# Altium PCB tsc.1r.PcbDoc
Units mm, origin at the board's own origin, x right, y up, seen from the top; angles counter-clockwise.
Board outline 151 x 86.38 mm, 2 copper layers (Top Layer, Bottom Layer); 15 components, 20 nets, 51 pads, 0 vias.
Unrouted connection lines stored in the file: 1.
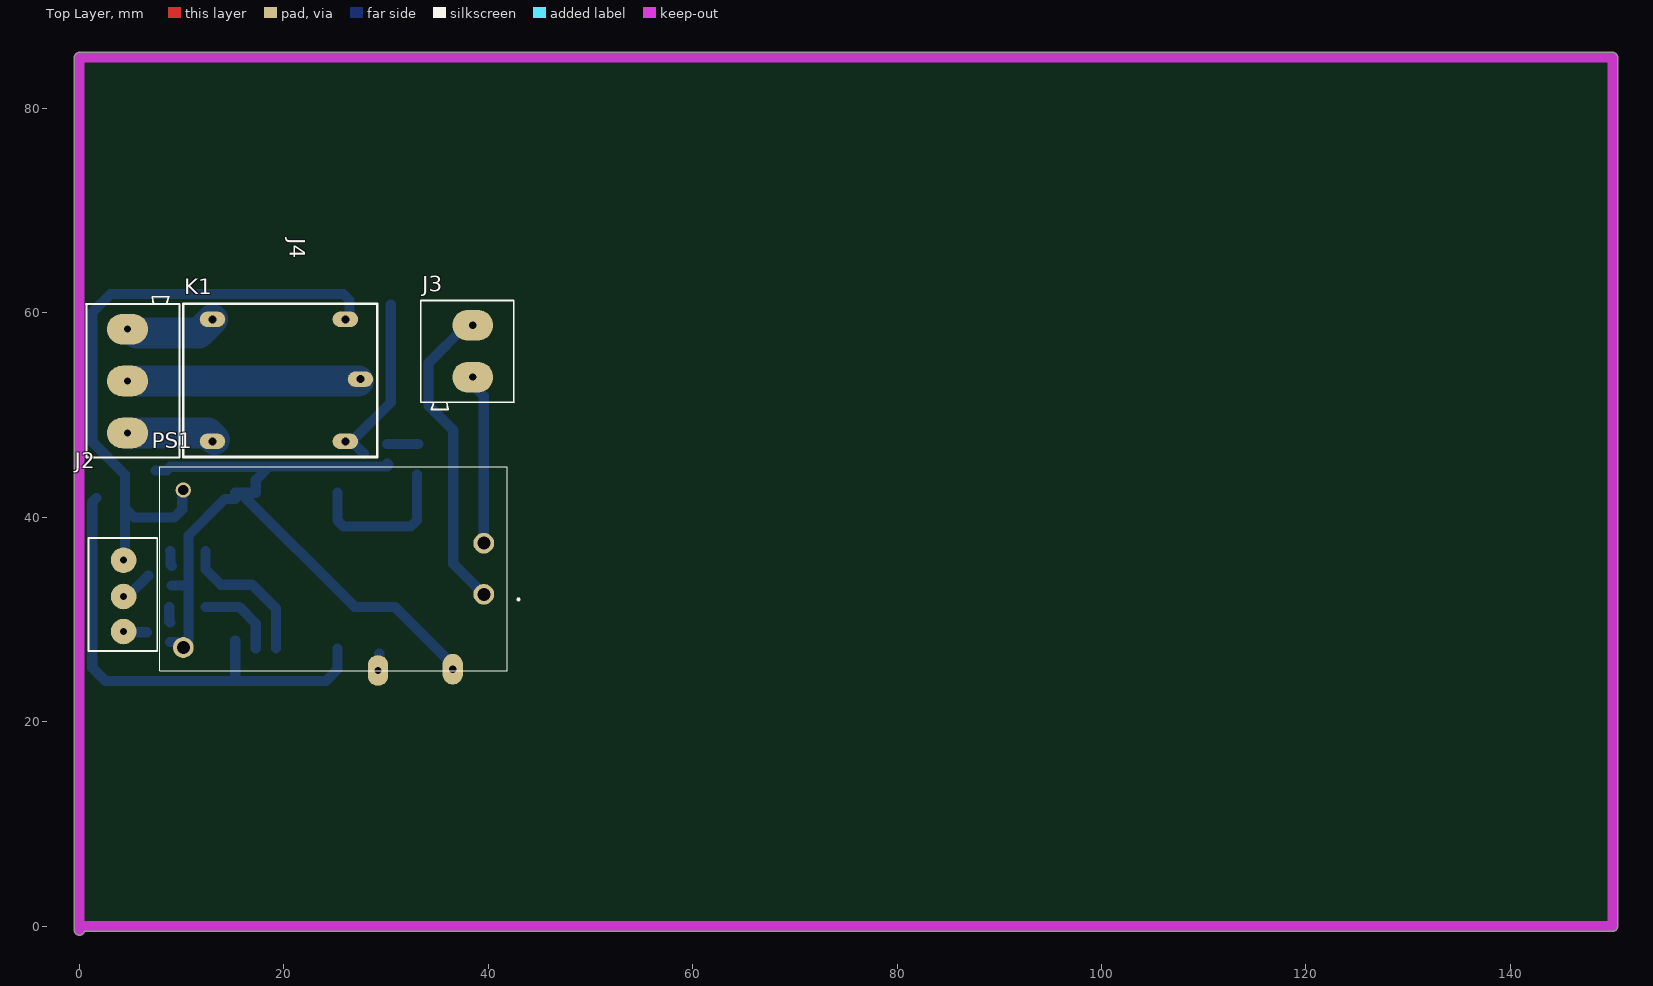
[diagram p0: Top Layer view]
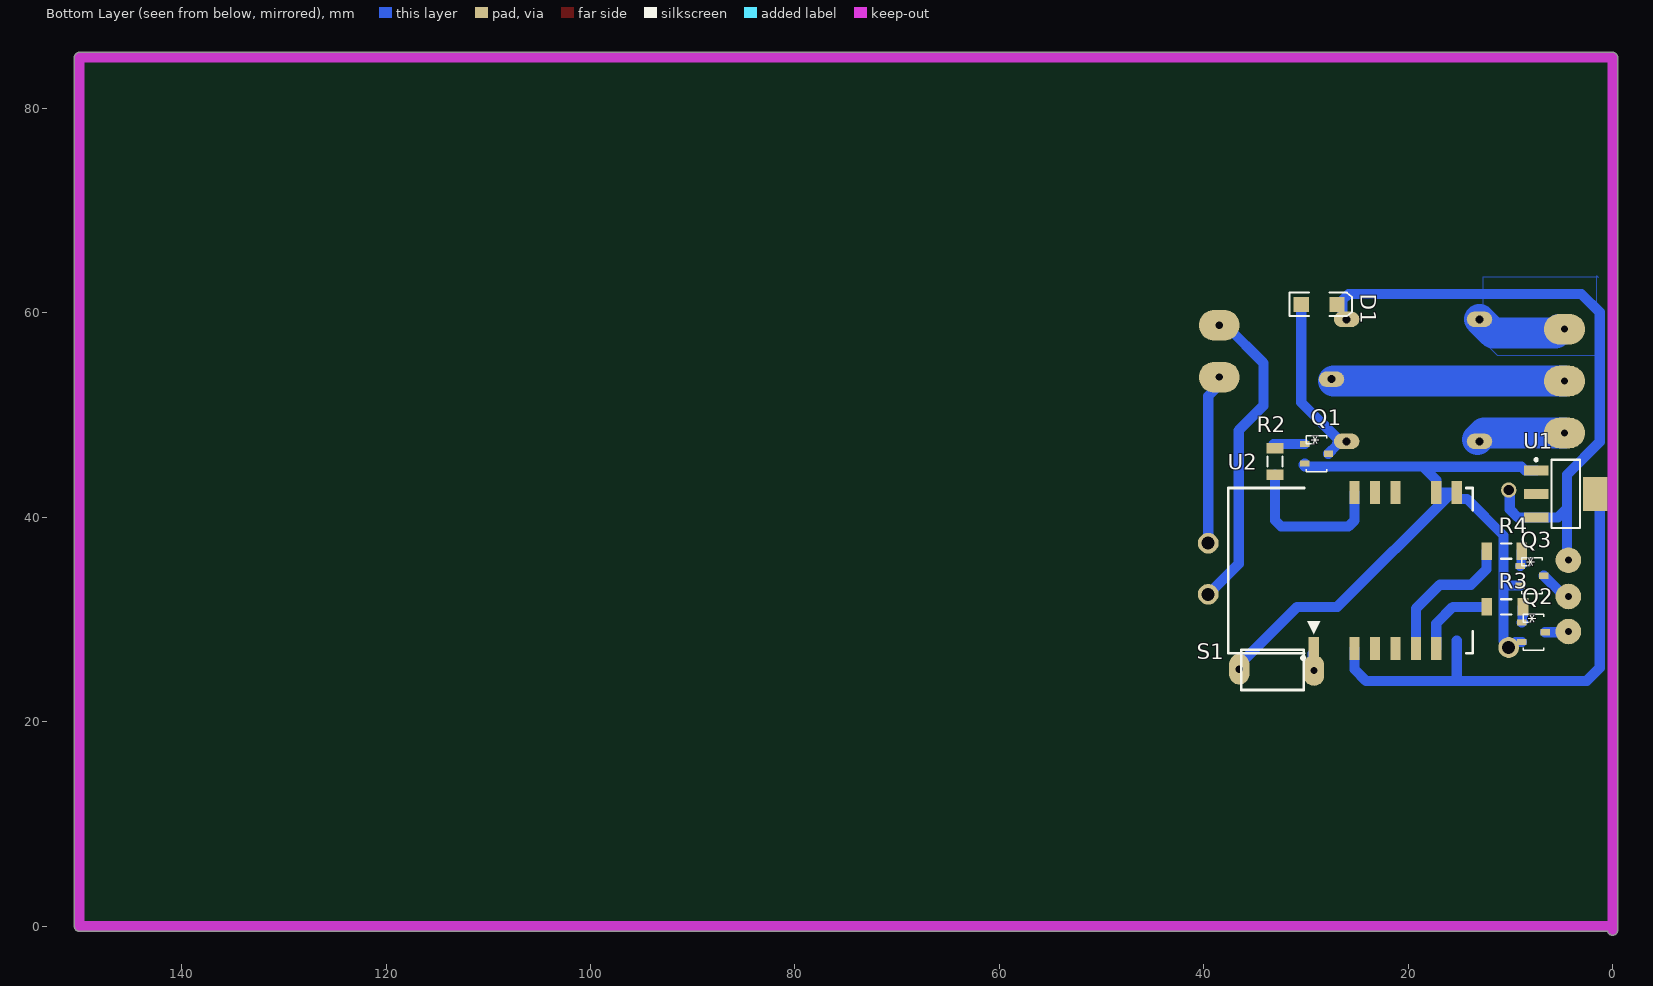
[diagram p1: Bottom Layer view, seen from below]
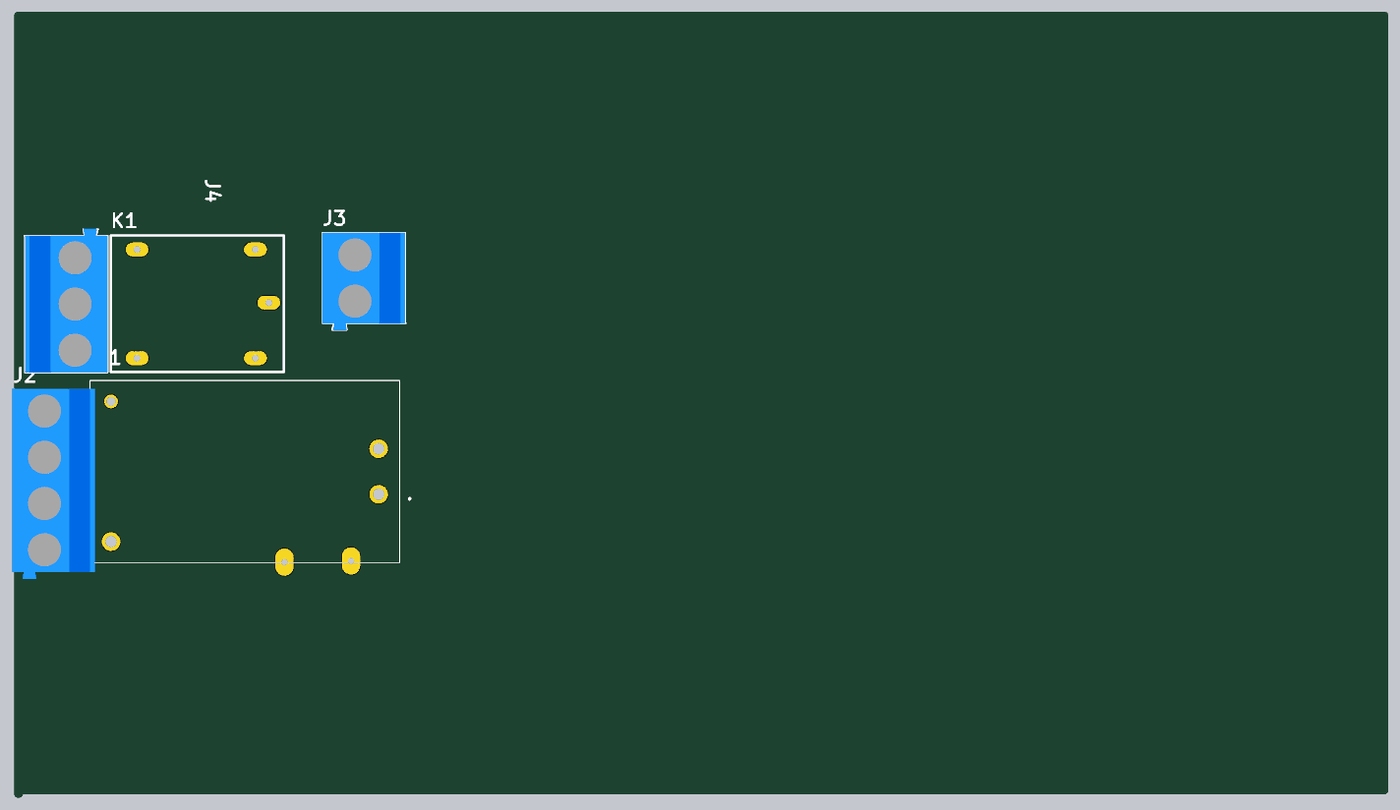
[diagram p2: 3D render of the assembled board from above, using the file's embedded part models]

## Layer stack, top to bottom
Top Solder: solder mask 0.0102, Solder Resist, Dk 3.5
Top Layer: signal copper 0.0356
Dielectric 1: dielectric 0.32, FR-4, Dk 4.8
Bottom Layer: signal copper 0.0356
Bottom Solder: solder mask 0.0102, Solder Resist, Dk 3.5

## Board outline
-0.5,-0.381 -0.5,85 cw(c0,85) 0,85.5 150,85.5 cw(c150,85) 150.5,85 150.5,0 cw(c150,0) 150,-0.5 0.486,-0.5 cw(c0,-0.381)

## Design rules (kind name [scope] priority, off if disabled: settings)
Clearance Clearance_1 [InPolygon] p1: gap=0.8 ignorepadtopadclearanceinfootprint=FALSE
Clearance [All] p2: gap=0.254 ignorepadtopadclearanceinfootprint=FALSE except(0: Arc-Hole Track-Hole SMDPad-Hole THPad-Hole Via-Hole Fill-Hole Poly-Hole Region-Hole Text-Hole)
PolygonConnect [All] p1: connectstyle=Relief reliefconductorwidth=0.254 reliefentries=4 polygonreliefangle="90 Angle" airgapwidth=0.254
RoomDefinition tsc.1r [InComponentClass('tsc.1r')] p1: confinementstyle=ConfineIn formatcopy=TRUE lockcomponents=FALSE outline 144.907,-4.953 247.904,-4.953 247.904,23.114 144.907,23.114
RoutingLayers [All] p1: top layer_v5=FALSE bottom layer_v5=TRUE
RoutingVias [All] p1: holewidth=0.711 width=2.5 viastyle="Through Hole" minholewidth=0.711 minwidth=1.27 maxholewidth=0.711 maxwidth=2
SolderMaskExpansion [All] p1: expansion=0.102 istentingtop=FALSE
Width [All] p1: maxlimit=3 minlimit=0.5 preferedwidth=1
29 further rules are at their usual default settings.

## Components (designator, comment, footprint, x,y, rotation, side; value= is the part's Value field where it differs from the comment)
D1 "D Tunnel1" 3.2X1.6X1.1 28.702,60.833 r180 bottom
J2 "TBlock-4" "KF300-4 PIN" 4.318,26.416 r180 top
J3 "TBlock-2" "KF300-2 PIN" 38.481,53.721 r180 top
J4 "TBlock-3" "KF300-3 PIN" 4.699,58.42 r0 top
K1 "Relay-12vDC" Relays 29.146,45.91 r90 top
PS1 "HLK-PM01" HLKPM01 39.56,32.472 r180 top
Q1 "MMBT3904-TP" SOT23-3 28.956,47.498 r270 bottom
Q2 "MMBT3904-TP" SOT23-3 7.74,30.033 r270 bottom
Q3 "MMBT3904-TP" SOT23-3 7.874,35.56 r270 bottom
R2 "10K" "RES 1206 (3216X08L)"#1 33.02,45.466 r90 bottom
R3 "10K" "RES 1206 (3216X08L)"#2 10.414,31.242 r180 bottom
R4 "10K" "RES 1206 (3216X08L)"#3 10.414,36.703 r180 bottom
S1 "PB-2pin" PB-2pin 36.322,21.971 r180 bottom
U1 "LM1117MP-3.3" MP04A_N 4.572,42.291 r180 bottom
U2 "ESP_12_E" ESP_12_E 29.241,26.793 r90 bottom

## Footprints (in the part's own frame and the unit in brackets; to place one, negate y for a bottom-side part, rotate by r counter-clockwise, add the part's x,y. Pads: shape width x height; smd on the part's side, far side on the other; paste and mask are expansions set on the pad)
3.2X1.6X1.1 [mm] "SMT LED; 2 Flat Leads"
  rect 1.5x1.5 smd: 1(-1.75,0) 2(1.75,0)
  silkscreen extent -2.9,-1.15 3.2,1.15
ESP_12_E [mm] "ESP-12 Wi-Fi Module by AI-Thinker"
  rect 2.25x1 smd: 1(0.375,0) 3(0.375,-4) 4(0.375,-6) 5(0.375,-8) 6(0.375,-10) 7(0.375,-12) 15(15.625,-14) 16(15.625,-12) 18(15.625,-8) 19(15.625,-6) 20(15.625,-4)
  silkscreen extent -0.7,-15.57 16.08,8.37, body extent 0,-15.49 16,8.51, height 2.75
HLKPM01 [mm]
  round 2.032 hole 1.27: 1(0,0) 2(0,-5) 3(29.4,5.2)
  round 1.5 hole 1: 4(29.4,-10.2)
  silkscreen extent -3.5,-12.5 31.7,7.5
"KF300-2 PIN" [mm]
  oval 4x3 hole 0.7: 1(0,0) 2(0,-5.08)
  silkscreen extent -4.06,-7.49 5.08,3.18, body extent -3.99,-7.5 5.08,3.24, height 12.52
"KF300-3 PIN" [mm]
  oval 4x3 hole 0.7: 1(0,0) 2(0,-5.08) 3(0,-10.16)
  silkscreen extent -4.06,-12.57 5.08,3.17, body extent -4,-12.57 5.07,3.25, height 12.78
"KF300-4 PIN" [mm]
  round 2.5 hole 0.7: 1(0,-2.413) 2(0,-5.842) 3(0,-9.398)
  silkscreen extent -3.3,-11.56 3.43,-0.51, body extent -4.04,-17.65 5.03,3.25, height 12.52
MP04A_N [mm] "SOT223, 4-Leads, Body 6.5x3.5mm, Pitch 2.3mm, Lead Span 7mm, IPC Medium Density"
  rect 2.4x1 smd: 1(-2.9,2.3) 2(-2.9,0) 3(-2.9,-2.3)
  rect 2.4x3.3 smd: 4(2.9,0)
  silkscreen extent -3.03,-3.35 1.4,3.47, body extent -1.85,-3.35 1.85,3.35, height 1.8
PB-2pin [mm] "Switch"
  oval 2x3 hole 0.7: 1(-0.202,3.175) 2(7.112,3.048)
  silkscreen extent 0,1.14 6.1,5.08
Relays [mil]
  oval 60x98.43 hole 30: 1(300,65) 2(60,635) 3(530,635) 4(60,123.11) 5(530,123.11)
  silkscreen extent 0,0 591,748
"RES 1206 (3216X08L)"#1 [mm] "Chip Resistor, 2-Leads, Body 3.2x1.6mm, IPC High Density _ (0.125 W)"
  rect 1.05x1.7 smd: 1(-1.295,0) 2(1.301,0)
  silkscreen extent -0.5,-0.75 0.5,0.75, body extent -1.52,-0.76 1.53,0.76, height 0.6
"RES 1206 (3216X08L)"#2 [mm] "Chip Resistor, 2-Leads, Body 3.2x1.6mm, IPC High Density _ (0.125 W)"
  rect 1.05x1.7 smd: 1(-1.905,0) 2(1.651,0)
  silkscreen extent -0.5,-0.75 0.5,0.75, body extent -1.52,-0.76 1.53,0.76, height 0.6
"RES 1206 (3216X08L)"#3 [mm] "Chip Resistor, 2-Leads, Body 3.2x1.6mm, IPC High Density _ (0.125 W)"
  rect 1.05x1.7 smd: 1(-1.905,0) 2(1.524,0)
  silkscreen extent -0.5,-0.75 0.5,0.75, body extent -1.52,-0.76 1.53,0.76, height 0.6
SOT23-3 [mm]
  rect 0.6x0.9 smd: 1(0.32,-1.15) 2(2.22,-1.15) 3(1.27,1.15)
  silkscreen extent -0.48,-1 3.02,1

## Part data
D1: "Tunnel Diode - RLC Model", LatestRevisionDate=17-Jul-2002, LatestRevisionNote="Re-released for DXP Platform.", PackageDescription="SM LED; 2 Flat Leads", PackageReference=3.2X1.6X1.1, PackageVersion=Feb-2002, Published=8-Jun-2000, Publisher="Altium Limited"
K1: library part Relay-05vDC, "Relay-05vDC-240AC 5A", ComponentLinkURL=www.picpars.com, Designer="Seyed Mohsen Ghasemain"
PS1: "<b>Ultra-compact power module</b><p> Source: <a href=\"https://datasheet.lcsc.com/szlcsc/1906201102_HI-LINK-HLK-PM03_C209904.pdf\"> Datasheet </a>", Package="Package Analog Devices", Availability=Unavailable, MF=Hi-link, MP=hlk-pm01, Price=None, SnapEDA_Link=https://www.snapeda.com/parts/hlk-pm01/Hi-link/view-part/2875605/?ref=snap
Q1 Q2 Q3: "Bipolar _BJT_ Transistor NPN 40V 200mA 300MHz 350mW Surface Mount SOT-23", Package="SOT-23 Micro Commercial", Availability=Unavailable, MF="Micro Commercial", MP=MMBT3904-TP, Price=None, SnapEDA_Link=https://www.snapeda.com/parts/MMBT3904-TP/Micro%20Commercial/view-part/805928/?ref=snap
R2 R3 R4: library part Resistor, "Resistor", Power="1/4 W", Tolerance=5%
S1: "Switch", Designer="Seyed Mohsen Ghasemian", E-mail=picpars@gmail.com, Publisher=www.picpars.com, WEB=www.picpars.com
U1: "800mA Low-Dropout Linear Regulator", DigiKeyPartNumber=LM1117MP-3.3CT-ND, Manufacturer="National Semiconductor", PackageTopMarking=XYTT*N05A, PowerWise=N, Code_IPC=SOT223-4, Code_JEDEC=TO-261-AA, ComponentLink1Description="LM1117 Datasheet", ComponentLink1URL=http://www.national.com/ds/LM/LM1117.pdf, ComponentLink2Description="LM1117 Web Page", ComponentLink2URL=http://www.national.com/pf/LM/LM1117.html, ComponentLink3Description="MP04A Package Page", ComponentLink3URL=http://www.national.com/packaging/folders/mp04a.html, CompType="LDO IC", DatasheetVersion=Apr-2006, PackageDescription="Molded SOT-223, 6.50 x 3.56 x 1.6mm Body, 4 Lead, 2.3mm Pitch", PackageReference=MP04A, PackageVersion="revB, Apr-2003", PartNumber=LM1117MP-3.3, PinCount=4, Published=4-Dec-2008, Publisher="Altium Limited", RoHS=O
U2: "ESP-12 Wi-Fi Module by AI-Thinker", IC=ESP8266-EX, Vendor=Ai-thinker

## Nets (pads, with @x,y where several pads share a name; then routed paths per layer and width w, separated by ;. In a path a pad name is that pad's centre, name@x,y a point inside that pad or via, vN(x,y) a via of type N, cw(c..) or ccw(c..) an arc to the next point about the centre after c; other vN are vias at no path point)
btn: 
GND: PS1.3 Q1.2 Q2.2 Q3.2 S1.1 U1.1 U2.15 U2.16 | length 77.2
  Bottom Layer w1: U1.1 8.553,44.591 8.92,44.958 18.182,44.958 18.362,44.778 17.241,43.657 U2.16 15.748,42.418 ; Q2.2 9.484,27.813 10.025,27.272 PS1.3 10.16,27.407 10.668,27.915 10.668,33.274 ; Q3.2 10.602,33.34 10.668,33.274 ; 18.182,44.974 30.106,44.974 ; Q1.2 Q1.2@30.227,45.157 ; S1.1 36.524,25.579 30.861,31.242 26.924,31.242 15.748,42.418 ; 10.668,33.274 10.668,38.227 14.234,41.793 15.241,41.793 U2.15 15.748,42.418
NetD1_1: D1.1 K1.4 Q1.3 | length 17.2
  Bottom Layer w1: K1.4 26.649,47.434 30.452,51.237 D1.1 ; K1.4@26.798,47.383 26.96,47.221 26.96,47.081 27.806,46.235 Q1.3
NetD2_2: 
NetJ2_1: J2.1 Q2.3 | length 2.3
  Bottom Layer w1: J2.1 4.384,28.763 Q2.3
NetJ2_2: J2.2 Q3.3 | length 3.2
  Bottom Layer w1: J2.2 4.692,32.258 Q3.3
NetJ3_1: J3.1 PS1.2 | length 16.9
  Bottom Layer w1: J3.1@37.846,53.594 37.973,53.594 38.489,53.078 38.489,52.951 39.56,51.88 PS1.2
NetJ3_2: J3.2 PS1.1 | length 30
  Bottom Layer w1: J3.2@37.846,58.674 37.719,58.674 34.163,55.118 34.163,50.927 36.576,48.514 36.576,35.456 PS1.1
NetJ4_1: J4.1 K1.3 | length 9
  Bottom Layer w3: J4.1 5.199,58.42 5.58,58.039 11.684,58.039 K1.3
NetJ4_2: J4.2 K1.1 | length 22.6
  Bottom Layer w3: J4.2 K1.1@27.305,53.34
NetJ4_3: J4.3 K1.2 | length 8.8
  Bottom Layer w3: J4.3 12.573,48.26 K1.2@13.208,47.625
NetQ1_1: Q1.1 R2.2 | length 3.1
  Bottom Layer w1: Q1.1 R2.2@33.173,47.178
NetQ2_1: Q2.1 R3.2 | length 1.6
  Bottom Layer w1: R3.2 8.788,31.217 8.788,29.815 Q2.1
NetQ3_1: Q3.1 R4.2 | length 1.5
  Bottom Layer w1: R4.2 8.915,36.678 8.915,35.349 Q3.1
o1: R2.1 U2.20 | length 15.4
  Bottom Layer w1: U2.20 25.241,39.702 25.827,39.116 32.434,39.116 33.02,39.702 R2.1
o2: R4.1 U2.6 | length 14.2
  Bottom Layer w1: R4.1 12.344,36.678 12.344,34.9 13.843,33.401 16.891,33.401 19.241,31.051 U2.6
o3: R3.1 U2.7 | length 8
  Bottom Layer w1: R3.1 15.621,31.242 17.241,29.622 U2.7
rst: S1.2 U2.1 | length 0.6
  Bottom Layer w1: S1.2@29.337,26.045 U2.1@29.337,26.67
vdD: D1.2 J2.3 K1.5 PS1.4 U1.3 | length 61.7
  Bottom Layer w1: J2.3 4.445,35.941 4.445,40.894 ; PS1.4 10.064,42.576 10.064,40.798 9.257,39.991 U1.3 5.348,39.991 4.445,40.894 ; K1.5@26.416,59.563 26.416,61.263 25.83,61.849 3.032,61.849 1.254,60.071 1.254,47.387 4.445,44.196 4.445,40.894
vesp: U1.2 U1.4 U2.3 | length 47.8
  Bottom Layer w1: U1.4@1.672,41.91 1.254,41.492 1.254,25.273 2.524,24.003 15.24,24.003 ; 15.24,27.94 15.24,24.003 ; U2.3 25.241,25.114 24.13,24.003 15.24,24.003
pads on no net: U2.4 U2.5 U2.18 U2.19

## Polygon pours and split planes (outlines as drawn)
GND on Bottom Layer "GND_L02_P009" (solid, pour order 9): 21.844,38.989
no net on Bottom Layer "NONET_L02_P003" (solid, shelved, pour order 3): 1.397,63.5 12.7,63.5 12.7,57.277 11.303,55.88 1.524,55.88 1.524,63.627
no net on Bottom Layer "NONET_L02_P001" (solid, pour order 1): 6.985,67.691

## Keep-outs
Keep-Out Layer:
  lines w1: 0,-0.381 0,85 150,85 150,0 0,0

## Other copper
Bottom Layer:
  pour cut-out: 3.556,61.341

## Text inside footprints (layer, text, board x,y; h text height)
Q1: Bottom Overlay "*" at 29.956,47.978 h1.27 r90
Q2: Bottom Overlay "*" at 8.74,30.513 h1.27 r90
Q3: Bottom Overlay "*" at 8.874,36.04 h1.27 r90
U2: Mechanical 13 "CUTOUT POLYGON" at 36.607,26.92 h0.25 r270; Mechanical 13 "ANTENNA AREA" at 37.115,26.92 h0.25 r270